# Altium PCB LM2587_BoostConverter.PcbDoc
Units mm, origin at the board's own origin, x right, y up, seen from the top; angles counter-clockwise.
Board outline 52 x 35 mm, 2 copper layers (Top Layer, Bottom Layer), stack 1.581 mm thick; 11 components, 7 nets, 30 pads, 61 vias.
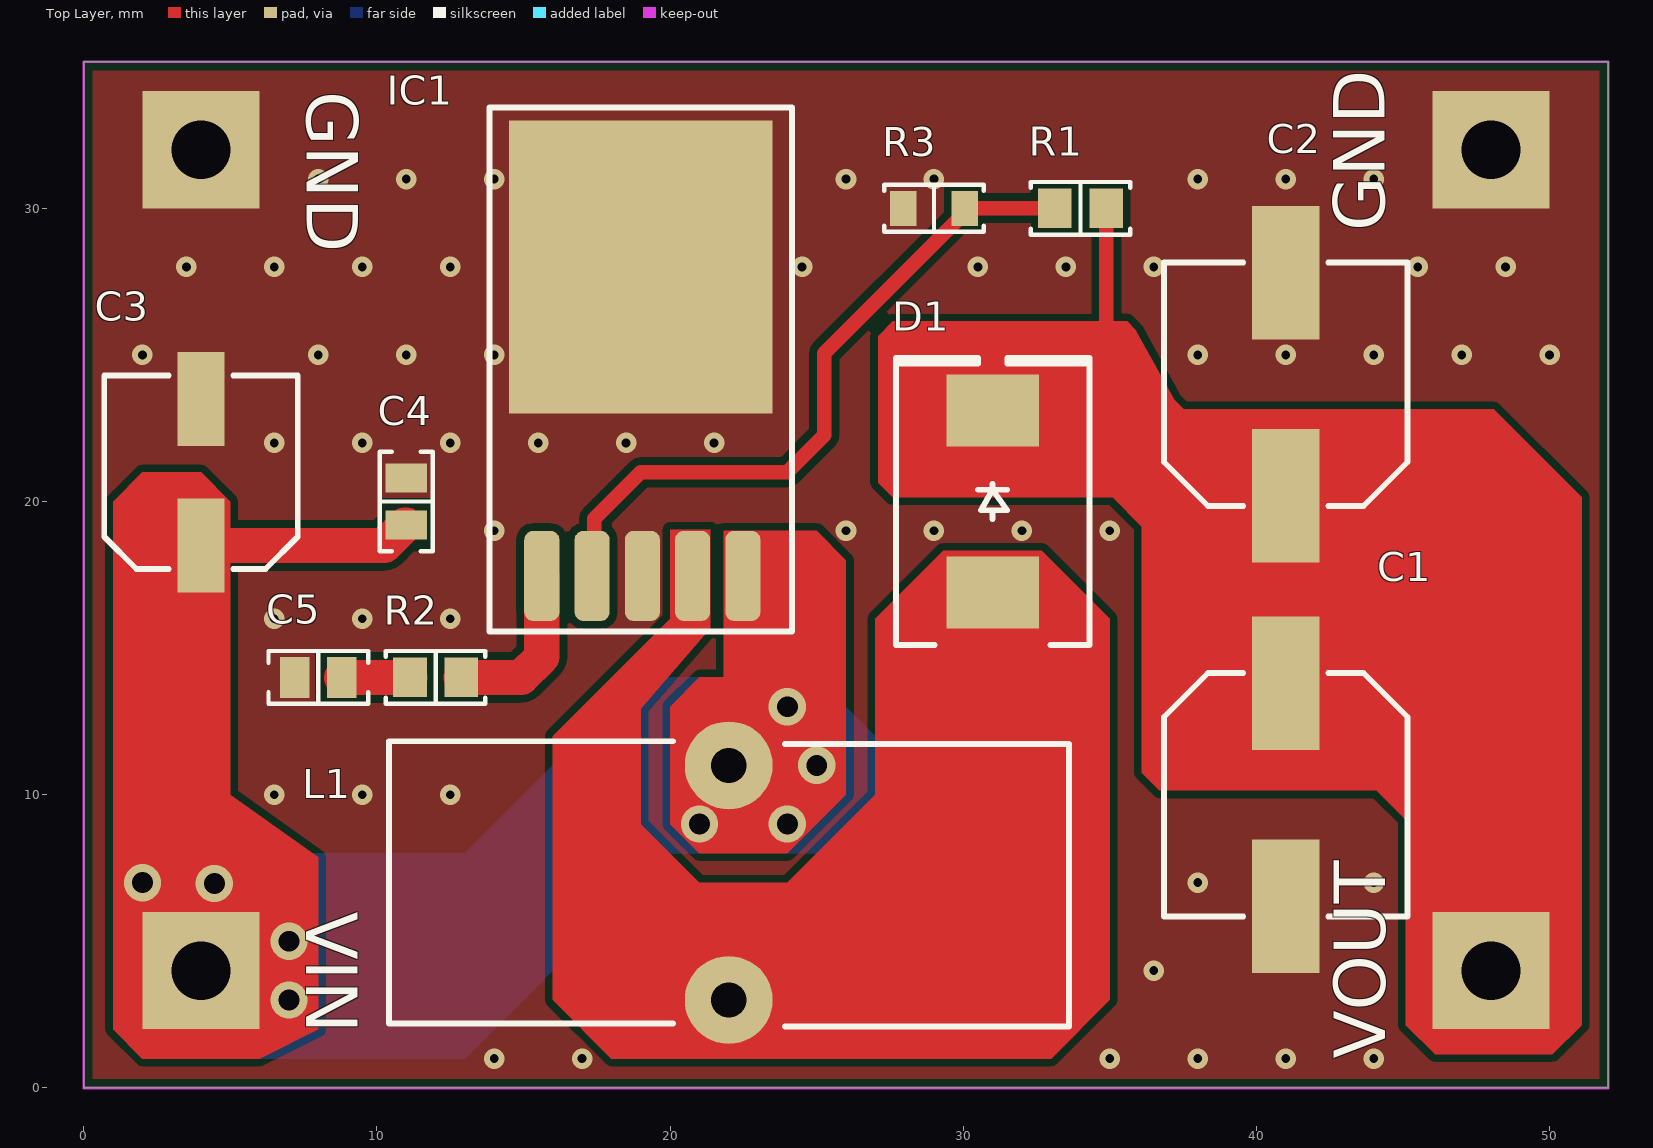
[diagram p0: Top Layer view]
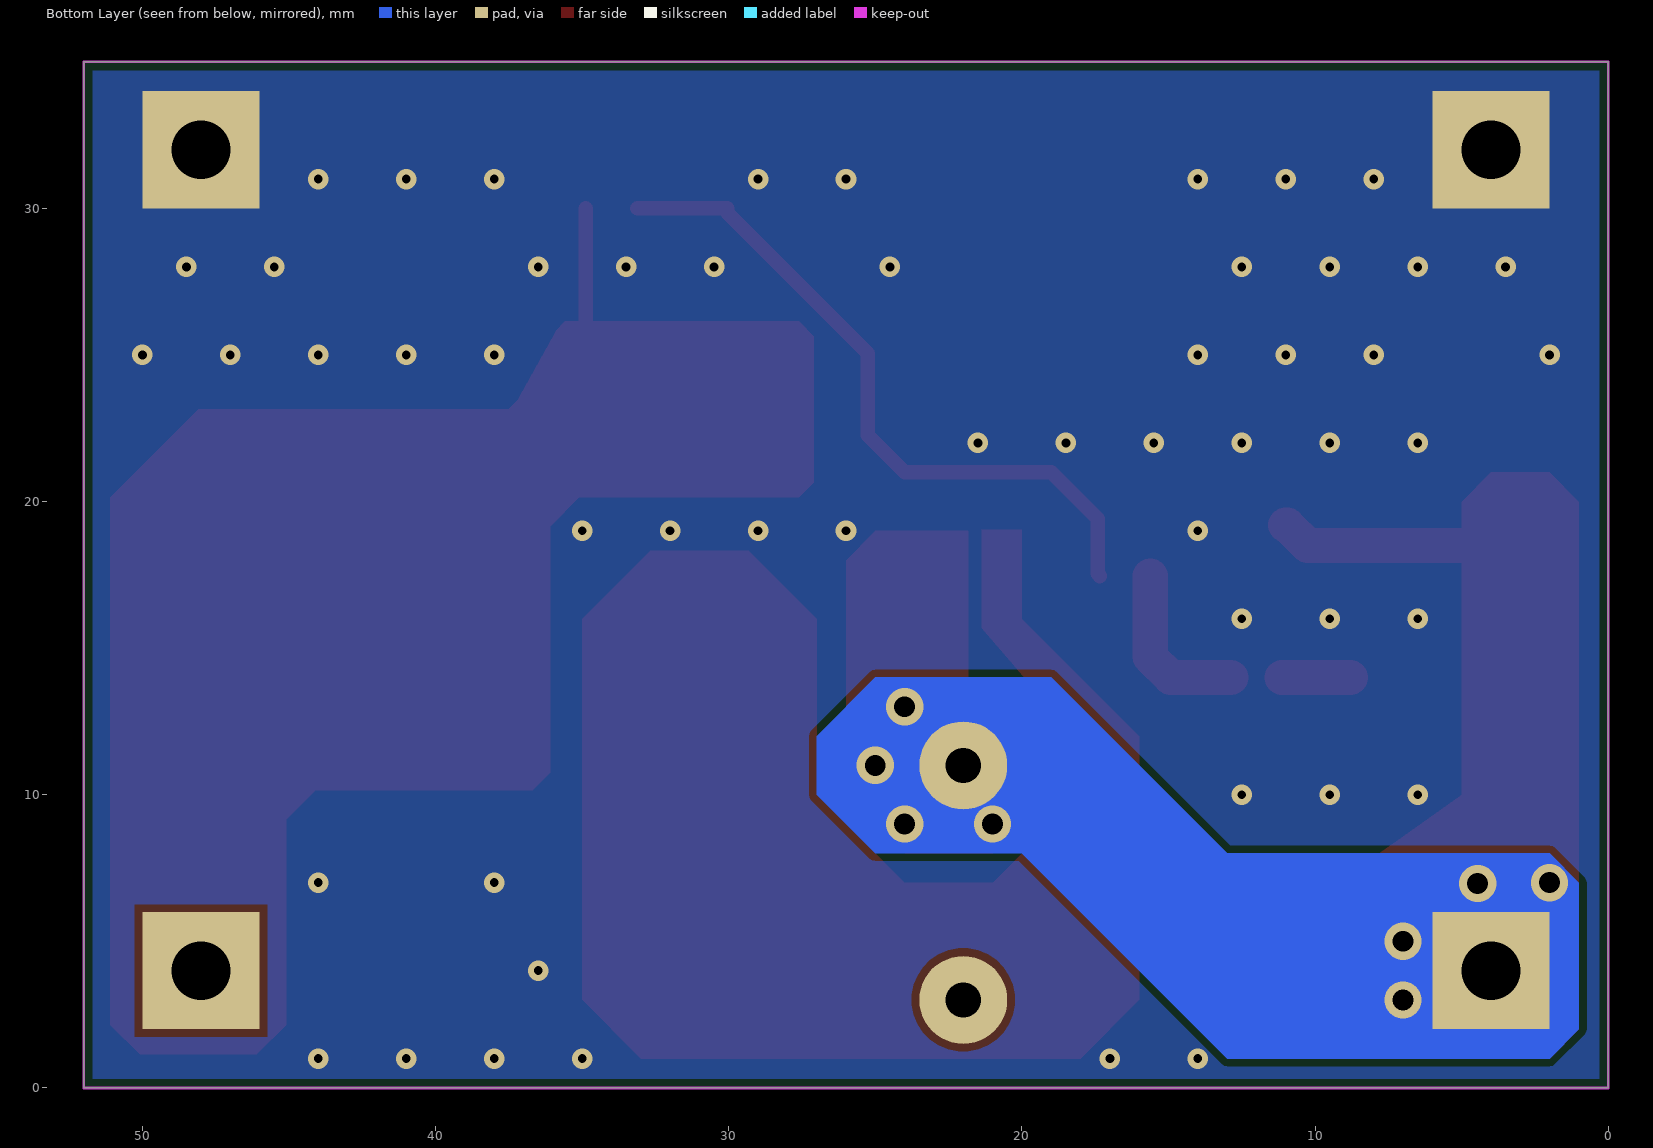
[diagram p1: Bottom Layer view, seen from below]
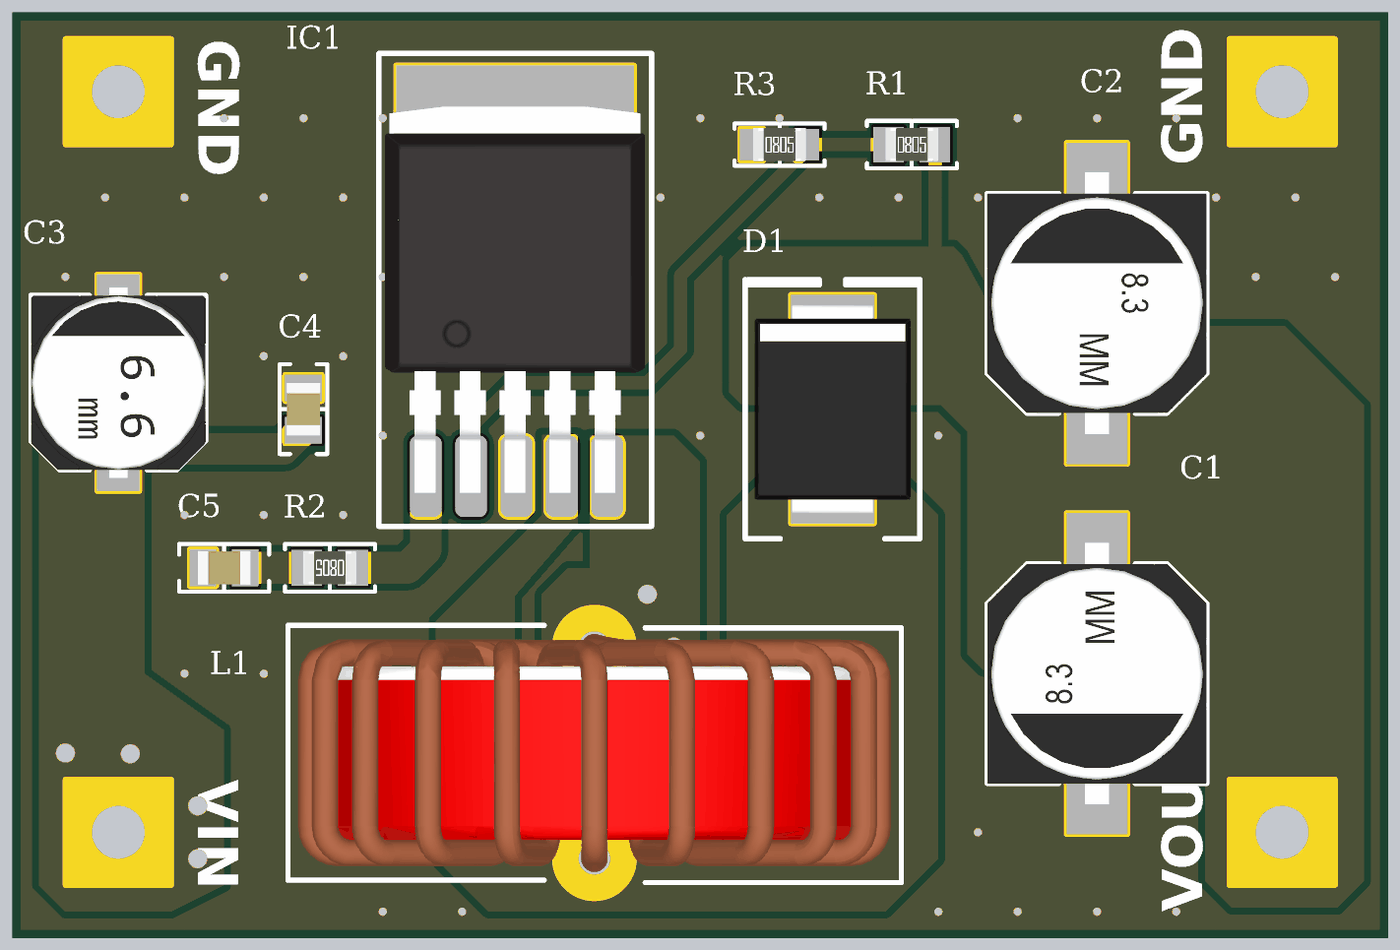
[diagram p2: 3D render of the assembled board from above, using the file's embedded part models]

## Layer stack, top to bottom
Top Solder: solder mask 0.0102, Solder Resist, Dk 3.5
Top Layer: signal copper 0.0356
Dielectric 1: dielectric 1.51, FR-4, Dk 4.8
Bottom Layer: signal copper 0.0356
Bottom Solder: solder mask 0.0102, Solder Resist, Dk 3.5

## Board outline
0,0 0,35 39,35 52,35 52,0

## Design rules (kind name [scope] priority, off if disabled: settings)
Clearance [All] p1: gap=0.254 ignorepadtopadclearanceinfootprint=FALSE
PolygonConnect [All] p1: connectstyle=Direct reliefconductorwidth=0.254 reliefentries=4 polygonreliefangle="90 Angle" airgapwidth=0.254
RoutingVias [All] p1: holewidth=0.5 width=0.8 viastyle="Through Hole" minholewidth=0.3 minwidth=0.5 maxholewidth=1 maxwidth=2
SilkToSolderMaskClearance [IsPad] p1: minsilkscreentomaskgap=0.12 clearancetoexposedcopper=TRUE
SolderMaskExpansion [All] p1: expansion=0.102 istentingtop=FALSE
Width [All] p1: maxlimit=3 minlimit=0.254 preferedwidth=0.5
29 further rules are at their usual default settings.

## Components (designator, comment, footprint, x,y, rotation, side; value= is the part's Value field where it differs from the comment)
C1 "100 µF" "CAP ALSMD 8.3MM H10.5MM" 41,10 r270 top
C2 "100 µF" "CAP ALSMD 8.3MM H10.5MM" 41,24 r90 top
C3 "56 µF" "CAP ALSMD 6.6MM H7.7MM" 4,21 r90 top
C4 "0.1 µF" "CAP 0805_2012" 11,20 r270 top
C5 "0.68 µF" "CAP 0805_2012" 8,14 r0 top
D1 "SURS8360T3G" "DO214AB SMC" 31,20 r90 top
IC1 "LM2587" D2PAK 18.997,26.393 r0 top
L1 "100µH" 7447070 22,7 r0 top
R1 "56 kOhms" "RES 0805_2012" 34,30 r0 top
R2 "3 kOhms" "RES 0805_2012" 12,14 r180 top
R3 "2 kOhms" "YAGEO RES 0805_2012" 29,30 r0 top

## Footprints (in the part's own frame and the unit in brackets; to place one, negate y for a bottom-side part, rotate by r counter-clockwise, add the part's x,y. Pads: shape width x height; smd on the part's side, far side on the other; paste and mask are expansions set on the pad)
7447070 [mm] "0.984\" Dia x 0.433\" W (25.00mm x 11.00mm)"
  round 3 hole 1.2: 1(0,4) 2(0,-4)
  silkscreen extent -11.59,-4.9 11.6,4.82, body extent -11.21,-4.5 11.21,4.5, height 22.21
"CAP 0805_2012" [mm] "Chip Capacitor, 2-Leads, Body 2.00x1.20mm, IPC Medium Density"
  rect 1x1.4 smd: 1(-0.8,0) 2(0.8,0)
  silkscreen extent -1.7,-0.9 1.7,0.9, body extent -1,-0.64 1,0.64, height 1.26
"CAP ALSMD 6.6MM H7.7MM" [mm] "Aluminum Electrolytic Capacitor, Body 6.60x6.60x7.70mm, IPC Low Density"
  rect 3.2x1.6 smd: 1(-2.5,0) 2(2.5,0)
  silkscreen extent -3.3,-3.3 3.3,3.3, body extent -3.6,-3.3 3.6,3.3, height 7.7
"CAP ALSMD 8.3MM H10.5MM" [mm] "Aluminum Electrolytic Capacitor, Body 8.30x8.30x10.50mm, IPC Low Density"
  rect 4.55x2.3 smd: 1(-3.8,0) 2(3.8,0)
  silkscreen extent -4.15,-4.15 4.15,4.15, body extent -4.95,-4.15 4.95,4.15, height 10.5
D2PAK [mm]
  rrect50% 1.2x3.075 smd: 1(-3.373,-8.933) 2(-1.658,-8.933) 3(0.056,-8.933) 4(1.771,-8.933) 5(3.485,-8.933)
  rect 9x10 smd: 3(0.003,1.607)
  silkscreen extent -5.15,-10.82 5.16,7.05, body extent -4.91,-9.56 4.91,5.04, height 4.22
"DO214AB SMC" [mm] "Molded Diode, 2-Leads, Body 6.85x5.90mm, IPC Medium Density"
  rect 2.45x3.15 smd: 1(-3.1,0) 2(3.1,0)
  silkscreen extent -4.9,-3.3 4.9,3.3, body extent -3.97,-2.95 3.97,2.95, height 2.6
"RES 0805_2012" [mm] "Chip Resistor, 2-Leads, Body 2.00x1.25mm, IPC Medium Density"
  rect 1.15x1.35 smd: 1(-0.875,0) 2(0.875,0)
  silkscreen extent -1.7,-0.9 1.7,0.9, body extent -1,-0.62 1,0.63, height 0.6
"YAGEO RES 0805_2012" [mm] "Chip Resistor, 2-Leads, Body 2.00x1.25mm"
  rect 0.9x1.2 smd: 1(-1.05,0) 2(1.05,0)
  silkscreen extent -1.7,-0.8 1.7,0.8, body extent -1,-0.62 1,0.63, height 0.6

## Part data
C1 C2: library part EEE-FK1H101P, "CAP ALUM 100UF 20% 50V SMD", Device Package="Radial, Can - SMD", Lifetime @ Temp.="2000 Hrs @ 105°C", manufacturer="Panasonic Electronic Components", Operating Temperature="-55°C ~ 105°C", Ratings=AEC-Q200, Ripple Current @ High Frequency="350 mA @ 100 kHz", Ripple Current @ Low Frequency="262.5 mA @ 120 Hz", Supplier Part Number 1=PCE3809CT-ND, Tolerance=±20%, Voltage - Rated="50 V", Applications=Automotive, Capacitance="100 µF", componentlink2description="DigiKey Link", componentlink2url=https://www.digikey.com/en/products/detail/panasonic-electronic-components/EEE-FK1H101P/765978, Height - Seated (Max)="0.413\" (10.50mm)", lastupdated="3.06.2024 20:15:48", Lifecycle Status=Active, Minimum Order=1, Mounting Type="Surface Mount", Package / Case="Radial, Can - SMD", packaging=TapeAndReel, Part Number=EEE-FK1H101P, Part Status=Active, partid=7485, Polarization=Polar, price=0.22, series=FK, Size / Dimension="0.315\" Dia (8.00mm)", Supplier 1=DigiKey, Surface Mount Land Size="0.327\" L x 0.327\" W (8.30mm x 8.30mm)", Impedance="340 mOhms"
C3: library part UWD1V560MCL1GS, "CAP ALUM 56UF 20% 35V SMD", Device Package="Radial, Can - SMD", Lifetime @ Temp.="2000 Hrs @ 105°C", manufacturer=Nichicon, Operating Temperature="-55°C ~ 105°C", Ripple Current @ High Frequency="280 mA @ 100 kHz", Ripple Current @ Low Frequency="140 mA @ 120 Hz", Supplier Part Number 1=493-9694-1-ND, Tolerance=±20%, Voltage - Rated="35 V", Applications="General Purpose", Capacitance="56 µF", componentlink1description=Datasheet, componentlink1url=http://nichicon-us.com/english/products/pdfs/e-uwd.pdf, componentlink2description="DigiKey Link", componentlink2url=https://www.digikey.com/en/products/detail/nichicon/UWD1V560MCL1GS/2550638, Height - Seated (Max)="0.303\" (7.70mm)", lastupdated="3.06.2024 20:16:18", Lifecycle Status=Active, Minimum Order=1, Mounting Type="Surface Mount", Package / Case="Radial, Can - SMD", packaging=TapeAndReel, Part Number=UWD1V560MCL1GS, Part Status=Active, partid=28126, Polarization=Polar, price=0.13, series=UWD, Size / Dimension="0.248\" Dia (6.30mm)", Supplier 1=DigiKey, Surface Mount Land Size="0.260\" L x 0.260\" W (6.60mm x 6.60mm)", Impedance="340 mOhms"
C4: library part CC0805JRX7R9BB104, "CAP CER 0.1UF 50V X7R 0805", Device Package="0805 (2012 Metric)", manufacturer=Yageo, Operating Temperature="-55°C ~ 125°C", Supplier Part Number 1=311-1858-1-ND, Temperature Coefficient=X7R, Tolerance=±5%, Voltage - Rated=50V, Applications="General Purpose", Capacitance="0.1 µF", componentlink1description=Datasheet, componentlink1url=https://www.yageo.com/upload/media/product/productsearch/datasheet/mlcc/UPY-GPHC_X7R_6.3V-to-50V_18.pdf, componentlink2description="DigiKey Link", componentlink2url=https://www.digikey.com/en/products/detail/yageo/CC0805JRX7R9BB104/5195265, lastupdated="9.02.2024 20:16:08", Lifecycle Status=Active, Minimum Order=1, Mounting Type="Surface Mount, MLCC", Package / Case="0805 (2012 Metric)", packaging=TapeAndReel, Part Number=CC0805JRX7R9BB104, Part Status=Active, partid=42886, price=0.01, series=CC, Size / Dimension="0.079\" L x 0.049\" W (2.00mm x 1.25mm)", Supplier 1=DigiKey, Thickness (Max)="0.037\" (0.95mm)"
C5: library part CGA4J3X7R1H684K125AB, "CAP CER 0.68UF 50V X7R 0805", Device Package="0805 (2012 Metric)", manufacturer="TDK Corporation", Operating Temperature="-55°C ~ 125°C", Ratings=AEC-Q200, Supplier Part Number 1=445-6960-1-ND, Temperature Coefficient=X7R, Tolerance=±10%, Voltage - Rated=50V, Applications=Automotive, Capacitance="0.68 µF", componentlink1description=Datasheet, componentlink1url=https://product.tdk.com/info/en/catalog/datasheets/mlcc_automotive_general_en.pdf?ref_disty=digikey, componentlink2description="DigiKey Link", componentlink2url=https://www.digikey.com/en/products/detail/tdk-corporation/CGA4J3X7R1H684K125AB/2672853, lastupdated="9.02.2024 20:15:40", Lifecycle Status=Active, Minimum Order=1, Mounting Type="Surface Mount, MLCC", Package / Case="0805 (2012 Metric)", packaging=TapeAndReel, Part Number=CGA4J3X7R1H684K125AB, Part Status=Active, partid=13295, price=0.07, series=CGA, Size / Dimension="0.079\" L x 0.049\" W (2.00mm x 1.25mm)", Supplier 1=DigiKey, Thickness (Max)="0.057\" (1.45mm)"
D1: "DIODE GEN PURP 600V 3A SMC", Current - Average Rectified (Io)=3A, Current - Reverse Leakage @ Vr="10µA @ 600V", manufacturer="ON Semiconductor", Operating Temperature - Junction="-65°C ~ 175°C", Package / Case="DO-214AB, SMC", Supplier Device Package=SMC, Supplier Part Number 1=SURS8360T3GOSCT-ND, Voltage - DC Reverse (Vr) (Max)=600V, Voltage - Forward (Vf) (Max) @ If="1.25V @ 3A", componentlink1description=Datasheet, componentlink1url=http://www.onsemi.com/pub/Collateral/MURS320T3-D.PDF, componentlink2description="DigiKey Link", componentlink2url=http://digikey.com/product-detail/en/on-semiconductor/SURS8360T3G/SURS8360T3GOSCT-ND/9087771, Diode Type=Standard, lastupdated="3.06.2024 19:54:15", Lifecycle Status=Active, Minimum Order=1, Mounting Type="Surface Mount", packaging=TapeAndReel, Part Number=SURS8360T3G, Part Status=Active, partid=348, price=0.30, Reverse Recovery Time (trr)=75ns, series=-, Speed="Fast Recovery =< 500ns, > 200mA (Io)", Supplier 1=DigiKey
IC1: "Boost Converter"
L1: library part CB2016T101KV, "FIXED IND 100UH 170MA 5.85 OHM", Current - Saturation=70mA, Current Rating (Amps)=90mA, DC Resistance (DCR)="5.85Ohm Max", Device Package="0806 (2016 Metric)", Frequency - Self Resonant=8MHz, manufacturer="Taiyo Yuden", Operating Temperature="-40°C ~ 105°C", Supplier Part Number 1=587-3680-1-ND, Tolerance=±10%, Inductance Frequency - Test=796kHz, componentlink1description=Datasheet, componentlink1url="https://ds.yuden.co.jp/TYCOMPAS/ut/detail?pn=CB2016T101KV  &u=M", componentlink2description="DigiKey Link", componentlink2url=http://digikey.com/product-detail/en/taiyo-yuden/CB2016T101KV/587-3680-1-ND/4694189, Height - Seated (Max)="0.071\" (1.80mm)", lastupdated="3.06.2024 20:14:16", Lifecycle Status=Active, Material - Core=Ferrite, Minimum Order=1, Mounting Type="Surface Mount", Package / Case="0806 (2016 Metric)", packaging=TapeAndReel, Part Number=CB2016T101KV, Part Status=Active, partid=2807, price=0.10, series=CB, Shielding=Unshielded, Size / Dimension="0.079\" L x 0.063\" W (2.00mm x 1.60mm)", Supplier 1=DigiKey, Supplier Device Package="0806 (2016 Metric)", Type=Wirewound, Inductance=100µH
R1: library part CRGP0805F56K, "RES 56K OHM 1% 1/3W 0805", Device Package="0805 (2012 Metric)", manufacturer="TE Connectivity Passive Product", Operating Temperature="-55°C ~ 155°C", Power (Watts)="0.333W, 1/3W", Supplier Device Package=0805, Supplier Part Number 1=A130498CT-ND, Temperature Coefficient=±100ppm/°C, Tolerance=±1%, componentlink1description=Datasheet, componentlink1url=https://www.te.com/commerce/DocumentDelivery/DDEController?Action=srchrtrv&DocNm=9-1773463-9&DocType=DS&DocLang=English, componentlink2description="DigiKey Link", componentlink2url=https://www.digikey.com/en/products/detail/te-connectivity-passive-product/CRGP0805F56K/8577100, Composition="Thick Film", Features="Pulse Withstanding", Height - Seated (Max)="0.026\" (0.65mm)", lastupdated="8.02.2024 21:02:34", Lifecycle Status=Active, Minimum Order=1, Number of Terminations=2, Package / Case="0805 (2012 Metric)", packaging=TapeAndReel, Part Number=CRGP0805F56K, Part Status=Active, partid=28743, price=0.02, Resistance="56 kOhms", series=CRGP, Size / Dimension="0.079\" L x 0.049\" W (2.00mm x 1.25mm)", Supplier 1=DigiKey
R2: library part ERJ-6ENF3001V, "RES SMD 3K OHM 1% 1/8W 0805", Device Package="0805 (2012 Metric)", manufacturer="Panasonic Electronic Components", Operating Temperature="-55°C ~ 155°C", Power (Watts)="0.125W, 1/8W", Ratings=AEC-Q200, Supplier Device Package=0805, Supplier Part Number 1=P3.0KCCT-ND, Temperature Coefficient=±100ppm/°C, Tolerance=±1%, componentlink1description=Datasheet, componentlink1url=https://industrial.panasonic.com/cdbs/www-data/pdf/RDA0000/AOA0000C304.pdf, componentlink2description="DigiKey Link", componentlink2url=https://www.digikey.com/en/products/detail/panasonic-electronic-components/ERJ-6ENF3001V/366038, Composition="Thick Film", Features="Automotive AEC-Q200", Height - Seated (Max)="0.028\" (0.70mm)", lastupdated="8.02.2024 21:02:29", Lifecycle Status=Active, Minimum Order=1, Number of Terminations=2, Package / Case="0805 (2012 Metric)", packaging=TapeAndReel, Part Number=ERJ-6ENF3001V, Part Status=Active, partid=30109, price=0.01, Resistance="3 kOhms", series=ERJ-6EN, Size / Dimension="0.079\" L x 0.049\" W (2.00mm x 1.25mm)", Supplier 1=DigiKey
R3: library part AC0805FR-072KL, "RES SMD 2K OHM 1% 1/8W 0805", Device Package="0805 (2012 Metric)", manufacturer=Yageo, Operating Temperature="-55°C ~ 155°C", Power (Watts)="0.125W, 1/8W", Ratings=AEC-Q200, Supplier Device Package=0805, Supplier Part Number 1=YAG3718CT-ND, Temperature Coefficient=±100ppm/°C, Tolerance=±1%, componentlink1description=Datasheet, componentlink1url=https://www.yageo.com/upload/media/product/productsearch/datasheet/rchip/PYu-AC_51_RoHS_L_7.pdf, componentlink2description="DigiKey Link", componentlink2url=https://www.digikey.com/en/products/detail/yageo/AC0805FR-072KL/5896741, Composition="Thick Film", Features="Automotive AEC-Q200, Moisture Resistant", Height - Seated (Max)="0.024\" (0.60mm)", lastupdated="25.07.2024 09:20:24", Lifecycle Status=Active, Minimum Order=1, Number of Terminations=2, Package / Case="0805 (2012 Metric)", packaging=TapeAndReel, Part Number=AC0805FR-072KL, Part Status=Active, partid=34654, price=0.01, Resistance="2 kOhms", series=AC, Size / Dimension="0.079\" L x 0.049\" W (2.00mm x 1.25mm)", Supplier 1=DigiKey

## Free pads (board coordinates)
  rect 4x4 hole 2: GND(4,32) GND1(48,32) VIN(4,4) VOUT(48,4)

## Via types
v1: diameter 0.7, hole 0.3, Top Layer to Bottom Layer, tented both sides, 53 vias
v2: diameter 1.27, hole 0.711, Top Layer to Bottom Layer, tented both sides, 8 vias

## Nets (pads, with @x,y where several pads share a name; then routed paths per layer and width w, separated by ;. In a path a pad name is that pad's centre, name@x,y a point inside that pad or via, vN(x,y) a via of type N, cw(c..) or ccw(c..) an arc to the next point about the centre after c; other vN are vias at no path point)
GND: C1.2 C2.2 C3.2 C4.1 C5.1 IC1.3 pad.GND pad.GND1 R3.1
  other v1: 14,1 17,1 35,1 38,1 41,1 44,1 36.5,4 38,7 44,7 6.5,10 9.5,10 12.5,10 6.5,16 9.5,16 12.5,16 14,19 26,19 29,19 32,19 35,19 6.5,22 9.5,22 12.5,22 15.5,22 18.5,22 21.5,22 2,25 8,25 11,25 14,25 38,25 41,25 44,25 47,25 50,25 3.5,28 6.5,28 9.5,28 12.5,28 24.5,28 30.5,28 33.5,28 36.5,28 45.5,28 48.5,28 8,31 11,31 14,31 26,31 29,31 38,31 41,31 44,31
NetC5_2: C5.2 R2.2 | length 2.3
  Top Layer w1.2: C5.2 R2.2
NetD1_1: D1.1 IC1.4 L1.2
NetR1_1: IC1.2 R1.1 R3.2 | length 23.8
  Top Layer w0.5: IC1.2 17.411,17.533 17.411,19.411 19,21 24,21 25.263,22.263 25.263,25.063 30.05,29.85 R3.2 R1.1
NetR2_1: IC1.1 R2.1 | length 5.8
  Top Layer w1.2: R2.1 14.922,14 15.625,14.703 IC1.1
VIN: C3.1 C4.2 IC1.5 L1.1 pad.VIN | length 7.3
  Top Layer w1.2: C3.1 10.25,18.5 10.95,19.2 C4.2
  other v2: 7,3 7,5 4.454,6.968 2,7 21,9 24,9 25,11 24,13
VOUT: C1.1 C2.1 D1.2 pad.VOUT R1.2 | length 6.1
  Top Layer w0.5: R1.2 34.875,24.125 35,24

## Polygon pours and split planes (outlines as drawn)
GND on Bottom Layer "GND_L02_P000" (solid, pour order 0): 0.006,34.823 52.006,34.823 52.006,-0.177 0.006,-0.177 0.006,34.823
GND on Top Layer "GND_L01_P001" (solid, pour order 1): 0,35 52,35 52,0 0,0 0,35

## Keep-outs
Keep-Out Layer:
  the board outline again, w0.1

## Other copper
Top Layer:
  region net NetD1_1: 21.372,19.048 21.372,15.677 19,12.939 19,9 21,7 24,7 27,10 27,16 29.319,18.319 32.681,18.319 35,16 35,3 33,1 18,1 16,3 16,12 20.009,16.009 20.009,19.039
  region net VIN: 21.828,19 21.828,14 21,14 20,13 20,9 21,8 24,8 26,10 26,18 25,19
  region net VOUT: 51.093,2.143 50.093,1.143 46.093,1.143 45.093,2.143 45.093,9.143 44.093,10.143 36.693,10.143 36.093,10.743 36.093,19.143 35.093,20.143 27.593,20.143 27.093,20.643 27.093,25.643 27.593,26.143 35.593,26.143 35.872,25.863 37.193,23.473 37.523,23.143 48.093,23.143 51.093,20.143
  region net VIN: 5,20 4,21 2,21 1,20 1,2 2,1 6,1 8,2 8,7.861 5,10
Bottom Layer:
  region net VIN: 2,8 1,7 1,2 2,1 13,1 20,8 25,8 27,10 27,12 25,14 19,14 13,8

## Silkscreen, mask and mechanical layers (free items; w line width, h text height)
Top Overlay:
  text "GND" at 7.026,34 h3 r270
  text "GND" at 44.964,29.216 h3 r90
  text "VIN" at 7.006,6 h3 r270
  text "VOUT" at 44.974,1 h3 r90